# Altium PCB 调试烧写.PcbDoc
Units mm, origin at the board's own origin, x right, y up, seen from the top; angles counter-clockwise.
Board outline 49.02 x 50.29 mm, 2 copper layers (Top Layer, Bottom Layer); 21 components, 21 nets, 109 pads, 8 vias.
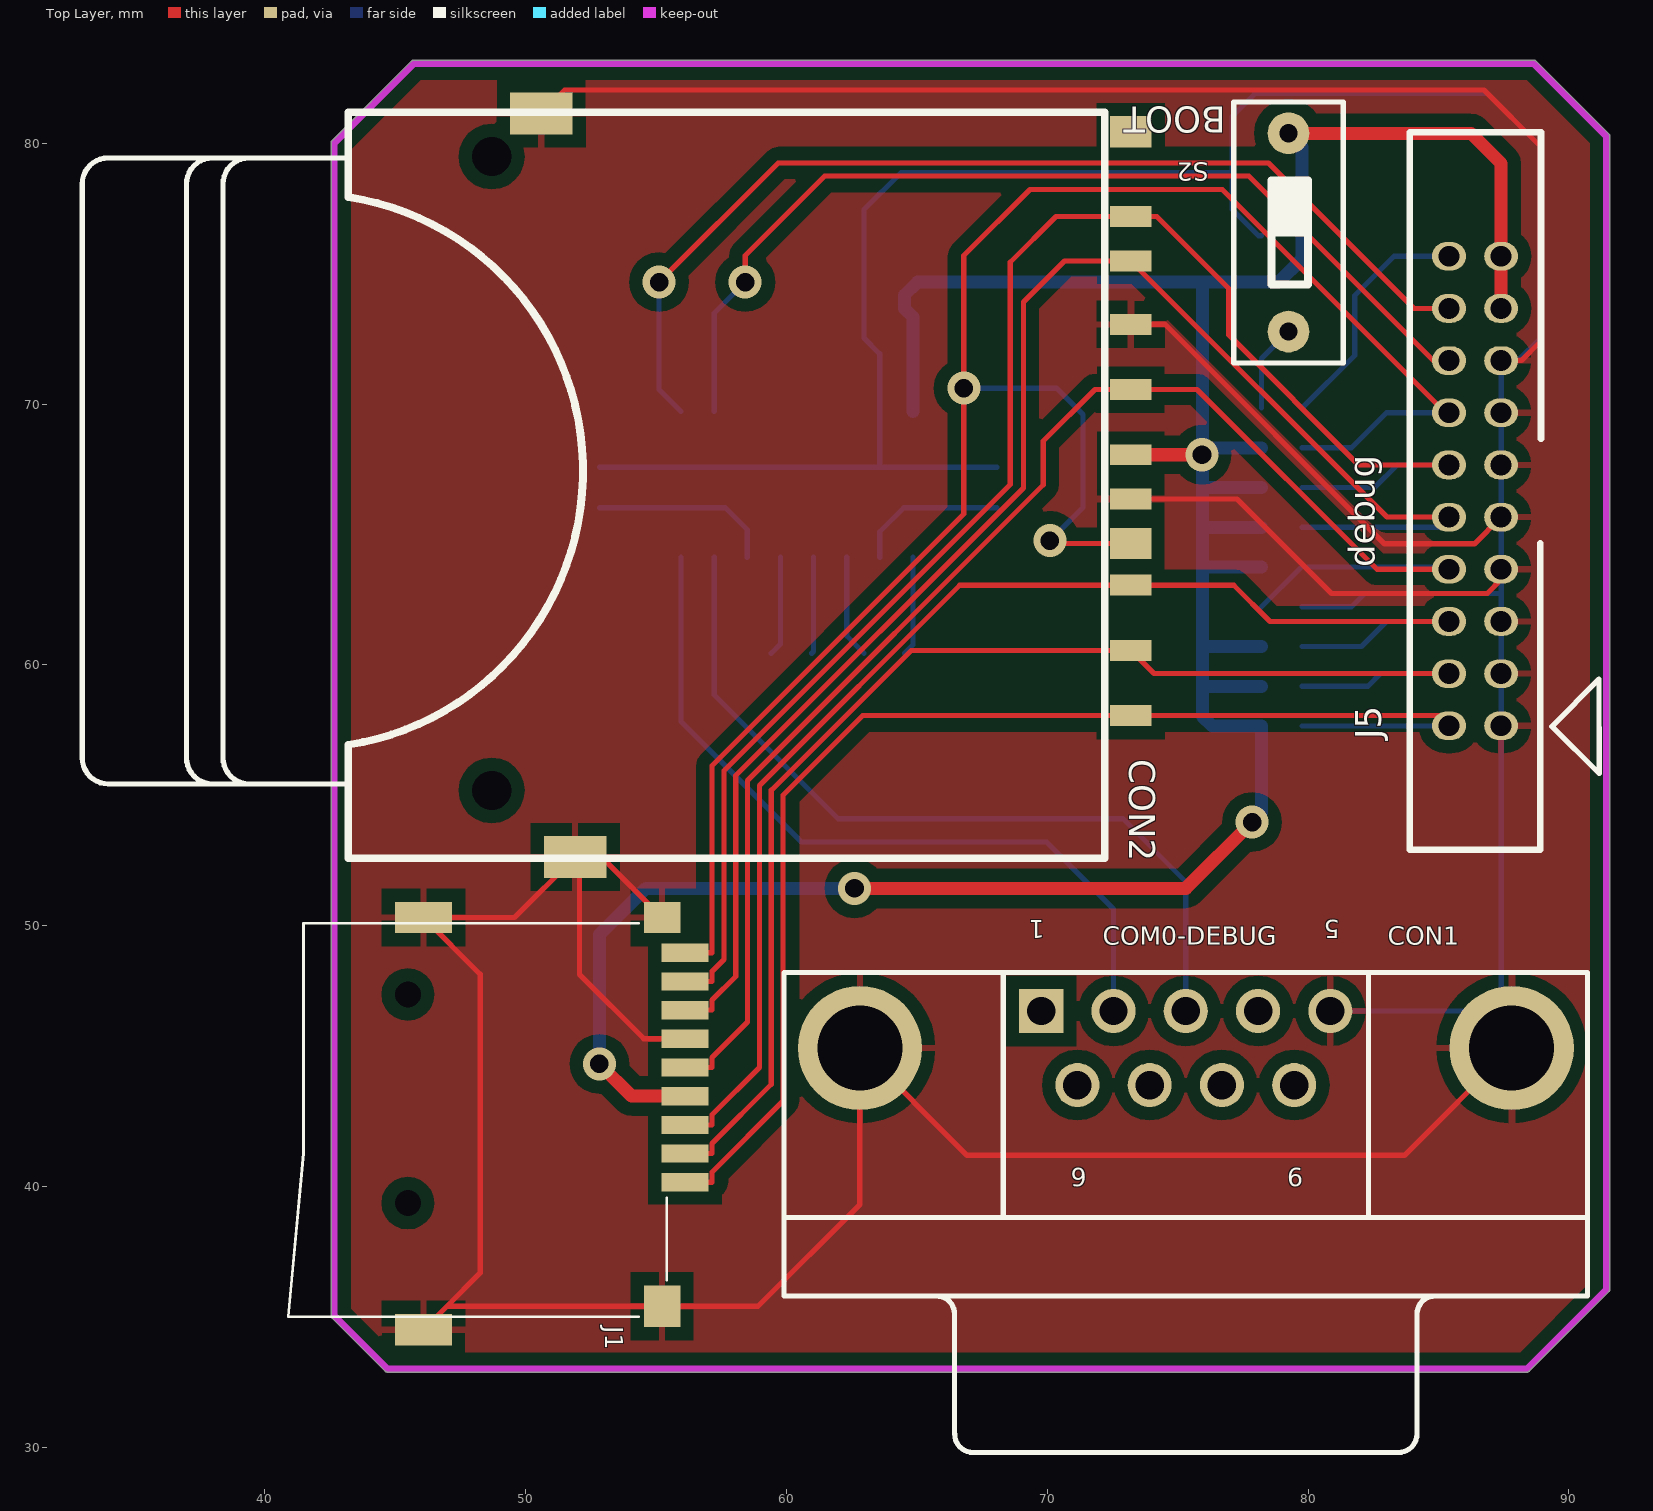
[diagram p0: Top Layer view]
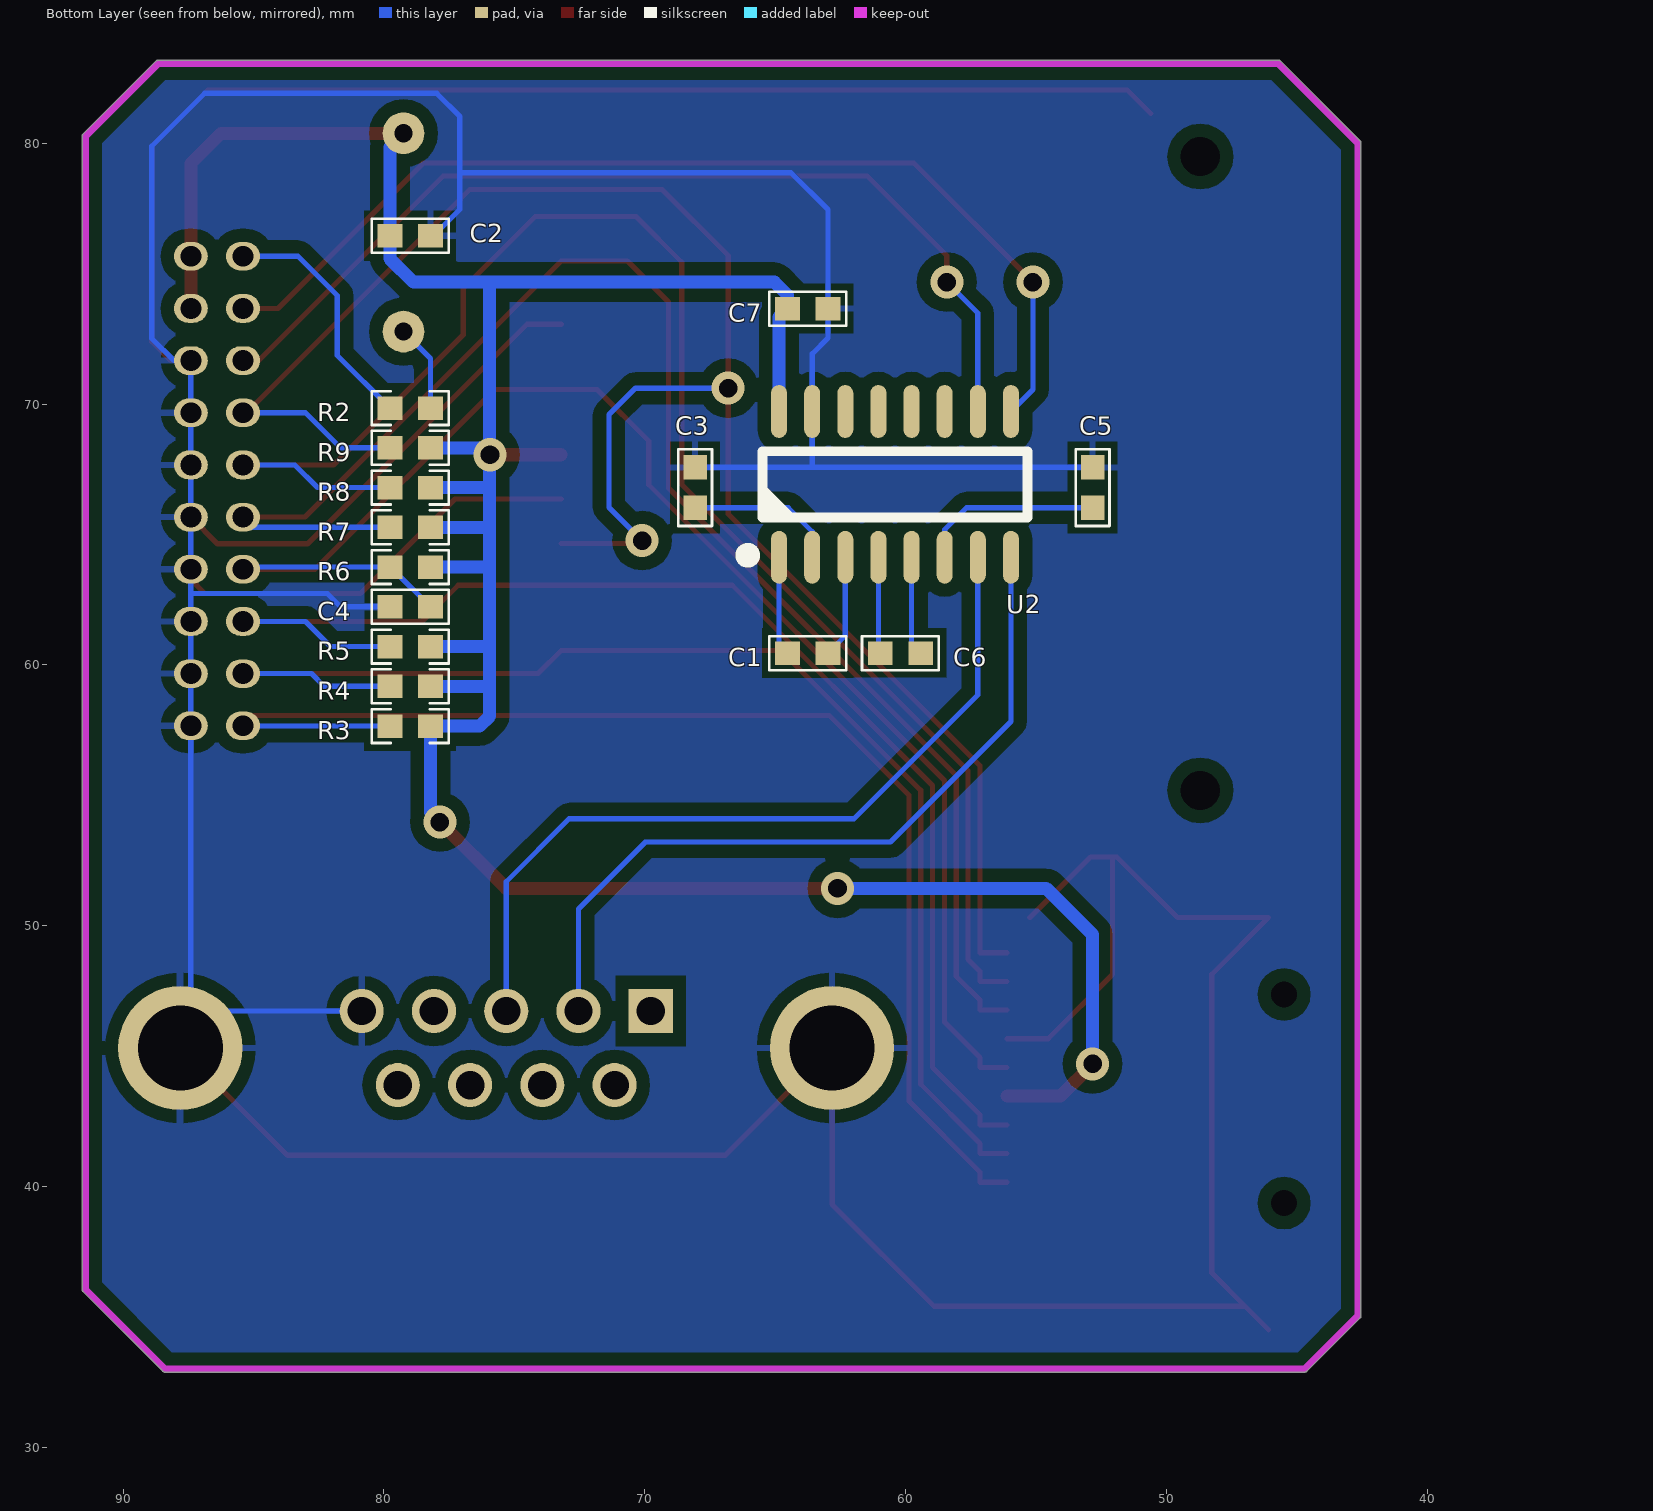
[diagram p1: Bottom Layer view, seen from below]

## Layer stack, top to bottom
Top Layer: signal copper 0.0356
Dielectric: dielectric 0.32, FR-4, Dk 4.8
Bottom Layer: signal copper 0.0356

## Board outline
42.582,34.962 44.614,32.93 44.613,32.93 ccw(c44.704,33.02) 44.704,32.893 88.392,32.893 ccw(c88.392,33.02) 88.483,32.93 88.482,32.93 91.53,35.978 91.53,35.977 ccw(c91.44,36.068) 91.567,36.068 91.567,80.264 ccw(c91.44,80.264) 91.53,80.355 91.53,80.354 88.736,83.148 88.737,83.148 ccw(c88.646,83.058) 88.646,83.185 45.72,83.185 ccw(c45.72,83.058) 45.629,83.148 45.63,83.148 42.582,80.1 42.582,80.101 ccw(c42.672,80.01) 42.545,80.01 42.545,35.052 ccw(c42.672,35.052)

## Design rules (kind name [scope] priority, off if disabled: settings)
Clearance [All] p1: gap=0.5
PolygonConnect [All] p1: connectstyle=Relief reliefconductorwidth=0.254 reliefentries=4 polygonreliefangle="90 Angle"
RoutingVias [All] p1: holewidth=0.711 width=1.27 viastyle="Through Hole" minholewidth=0.711 minwidth=1.27 maxholewidth=0.711 maxwidth=1.27
SilkscreenOverComponentPads [All] p1: minsilkscreentomaskgap=0.254
SolderMaskExpansion [All] p1: expansion=0.102
Width [All] p1: maxlimit=0.5 minlimit=0.2 preferedwidth=0.2
27 further rules are at their usual default settings.

## Components (designator, comment, footprint, x,y, rotation, side; value= is the part's Value field where it differs from the comment)
C1 "Cap" C0603_M1608 63.754,60.452 r180 bottom
C2 "Cap" C0603_M1608 78.994,76.454 r0 bottom (schematic designator C3)
C3 "Cap" C0603_M1608 68.072,66.802 r270 bottom
C4 "Cap" C0603_M1608 78.994,62.23 r180 bottom
C5 "Cap" C0603_M1608 52.832,66.802 r270 bottom
C6 "Cap" C0603_M1608 60.198,60.452 r0 bottom
C7 "C0603" C0603_M1608 63.754,73.66 r0 bottom
CON1 "COM0-DEBUG" DSUB1.385-2H9-M 75.311,35.814 r180 top locked
CON2 "SD" SD-CARD3 60.953,66.889 r270 top locked
J1 "SDCARD-KMSD18" TF-CARD 50.8,42.418 r270 top
J5 "debug" IDC20S 87.376,57.658 r90 top
R2 "R0603" R0603_M1608 78.994,69.85 r0 bottom (schematic designator R3)
R3 "R0603" R0603_M1608 78.994,57.658 r180 bottom
R4 "R0603" R0603_M1608 78.994,59.182 r180 bottom
R5 "R0603" R0603_M1608 78.994,60.706 r180 bottom
R6 "R0603" R0603_M1608 78.994,63.754 r180 bottom
R7 "R0603" R0603_M1608 78.994,65.278 r180 bottom
R8 "R0603" R0603_M1608 78.994,66.802 r180 bottom
R9 "R0603" R0603_M1608 78.994,68.326 r180 bottom
S2 "BOOT" SWITCH_1P 79.248,76.581 r180 top locked (schematic designator S1)
U2 "MAX3232ESE" SOIC-16N 60.452,66.929 r90 bottom

## Footprints (in the part's own frame and the unit in brackets; to place one, negate y for a bottom-side part, rotate by r counter-clockwise, add the part's x,y. Pads: shape width x height; smd on the part's side, far side on the other; paste and mask are expansions set on the pad)
C0603_M1608 [mm] "Chip Capacitor, 2-Leads, Body 1.6x0.8mm, IPC Medium Density"
  rect 0.95x0.9 smd: 1(-0.775,0) 2(0.775,0)
  silkscreen extent -1.48,-0.65 1.48,0.65, body extent -0.85,-0.45 0.85,0.45, height 0.55
DSUB1.385-2H9-M [mm] "Connector; D Subminiature; 9 Position; Right Angle; Pitch 1.385 mm"
  rect 1.69x1.69 hole 1.09: 1(5.54,-10.92)
  round 1.69 hole 1.09: 2(2.77,-10.92) 3(0,-10.92) 4(-2.77,-10.92) 5(-5.54,-10.92) 6(4.155,-8.08) 7(1.385,-8.08) 8(-1.385,-8.08) 9(-4.155,-8.08)
  round 4.76 hole 3.26: 10(-12.495,-9.5) 11(12.495,-9.5)
  silkscreen extent -15.4,-12.4 15.4,6
IDC20S [mm]
  oval 1.1x1.3 hole 0.8: 1(0.01,-0.025) 2(0.01,1.975) 3(2.01,-0.025) 4(2.01,1.975) 5(4.01,-0.025) 6(4.01,1.975) 7(6.01,-0.025) 8(6.01,1.975) 9(8.01,-0.025) 10(8.01,1.975) 11(10.01,-0.025) 12(10.01,1.975) 13(12.01,-0.025) 14(12.01,1.975) 15(14.01,-0.025) 16(14.01,1.975) 17(16.01,-0.025) 18(16.01,1.975) 19(18.01,-0.025) 20(18.01,1.975)
  silkscreen extent -4.74,-3.78 22.76,3.47
R0603_M1608 [mm] "Chip Capacitor, 2-Leads, Body 1.6x0.8mm, IPC Medium Density"
  rect 0.95x0.9 smd: 1(-0.775,0) 2(0.775,0)
  silkscreen extent -1.48,-0.65 1.48,0.65, body extent -0.85,-0.45 0.85,0.45, height 0.55
SD-CARD3 [mm]
  rect 0.8x1.6 smd: 1(6.33,12.25) 2(3.83,12.25) 3(0.53,12.25) 4(-1.17,12.25) 5(-3.67,12.25) 6(-6.17,12.25) 7(-8.6,12.25) 8(-10.3,12.25) 9(8.83,12.25)
  rect 1.2x1.6 smd: 10(-13.55,12.25) 11(2.23,12.25)
  rect 1.6x2.4 smd: 12(-14.25,-10.35) 13(14.25,-9.05)
  round 1 hole 1.5: 14(-12.6,-12.25) 15(11.7,-12.25)
  silkscreen extent -14.3,-27.95 14.3,11.25
SOIC-16N [mil]
  oval 80x24 smd: 1(-110.24,173.23) 2(-110.24,123.23) 3(-110.24,73.23) 4(-110.24,23.23) 5(-110.24,-26.77) 6(-110.24,-76.77) 7(-110.24,-126.77) 8(-110.24,-176.77) 9(109.76,-176.77) 10(109.76,-126.77) 11(109.76,-76.77) 12(109.76,-26.77) 13(109.76,23.23) 14(109.76,73.23) 15(109.76,123.23) 16(109.76,173.23)
  silkscreen extent -116,-202 50,229
SWITCH_1P [mm]
  round 1.6 hole 0.7: 1(0,-3.8) 2(0,3.8)
  silkscreen extent -2.1,-5 2.1,5
TF-CARD [mm]
  round 0 hole 1 unplated: 0(-4.95,-5.312) 0(3.05,-5.312)
  rect 0.7x1.8 smd: 1(1.15,5.313) 2(0.05,5.313) 4(-1.05,5.313) 5(-2.15,5.313) 6(-3.25,5.313) 7(-4.35,5.313) 8(-5.45,5.313) 9(2.25,5.313) 11(-6.55,5.313)
  rect 1.6x1.4 smd: 3(7,4.438)
  rect 1.2x1.4 smd: 6(-7.9,4.438)
  rect 1.2x2.2 smd: 12(7.9,-4.712) 13(-7.9,-4.712)
  silkscreen extent -7.68,-9.9 7.41,4.61

## Part data
C1 C2 C3 C4 C5 C6: "Capacitor"
C7: library part Cap, "Capacitor"
CON1: library part "D Connector 9", "Receptacle Assembly, 9 Position, Right Angle"
J1: library part SDCARD_KMSD18
J5: library part "Header 10X2", "Header, 10-Pin, Dual r"
R2 R3 R4 R5 R6 R7 R8 R9: library part Res1, "Resistor"
S2: library part "SW DIP-1"
U2: library part MAX3232

## Via types
v1: diameter 1.27, hole 0.711, Top Layer to Bottom Layer, 8 vias

## Nets (pads, with @x,y where several pads share a name; then routed paths per layer and width w, separated by ;. In a path a pad name is that pad's centre, name@x,y a point inside that pad or via, vN(x,y) a via of type N, cw(c..) or ccw(c..) an arc to the next point about the centre after c; other vN are vias at no path point)
GND: C2.1 C3.1 C4.1 C5.1 C7.1 CON1.5 CON1.10 CON1.11 CON2.3 CON2.6 CON2.12 CON2.13 J1.3 J1.6 J1.12 J1.13 J5.1 J5.3 J5.5 J5.7 J5.9 J5.11 J5.13 J5.15 U2.15 | length 282.1
  Top Layer w0.2: J1.12 46.988,35.418 ; CON2.12 51.506,82.042 86.741,82.042 88.9,79.883 88.9,72.39 88.178,71.668 J5.15 ; J1.6@55.238,50.318 52.917,52.639 CON2.13@52.07,52.639 ; J1.6@56.113,45.668 54.535,45.668 52.07,48.133 CON2.13@52.07,52.639 ; CON2.3 77.278,66.359 80.899,62.738 86.868,62.738 87.401,63.271 J5.7 ; CON2.6 74.515,73.059 82.931,64.643 86.376,64.643 J5.9 ; CON1.10 83.693,41.201 66.929,41.201 CON1.11 62.816,39.321 58.913,35.418 J1.3 46.988,35.418 ; 46.988,35.418 48.26,36.69 48.26,48.146 J1.13 49.582,50.318 CON2.13 CON2.13@52.07,52.639
  Bottom Layer w0.2: C5.1 63.5,67.577 ; C3.1 63.5,67.577 ; C2.1 78.105,76.454 77.089,77.47 77.089,78.867 ; C4.1 81.661,62.23 82.169,62.738 87.401,62.738 ; CON1.5 86.386,46.734 CON1.10@87.401,45.719 ; CON1.10 CON1.10@87.401,45.719 ; 63.5,67.577 63.582,67.659 U2.15 63.582,71.927 62.979,72.53 C7.1 62.979,77.457 64.389,78.867 77.089,78.867 ; 77.089,78.867 77.089,81.026 77.978,81.915 86.868,81.915 88.9,79.883 88.9,72.517 88.051,71.668 J5.15 J5.13 J5.11 J5.9 J5.7 87.401,62.738 ; CON1.10@87.401,45.719 J5.3 J5.5 87.401,62.738
LCD-D2: J5.20 R2.2 | length 9.4
  Bottom Layer w0.2: R2.2 81.788,71.869 81.788,74.168 83.288,75.668 J5.20
MMC0-CD: CON2.11 J1.11 J5.14 R9.1 | length 74.6
  Top Layer w0.2: J1.11 57.15,48.968 57.15,56.134 66.802,65.786 v1(66.802,70.612) 66.802,75.692 69.342,78.232 76.708,78.232 85.272,69.668 J5.14 ; v1(70.104,64.77) 70.215,64.659 CON2.11
  Bottom Layer w0.2: v1(66.802,70.612) 70.358,70.612 71.374,69.596 71.374,66.04 v1(70.104,64.77) ; R9.1 81.661,68.326 83.003,69.668 J5.14
MMC0-CLK: C4.2 CON2.5 J1.5 J5.8 R6.1 | length 57.4
  Top Layer w0.2: J1.5 57.15,44.568 57.15,44.955 58.512,46.317 58.512,55.57 69.85,66.908 69.85,68.58 71.829,70.559 CON2.5 75.745,70.559 82.636,63.668 J5.8
  Bottom Layer w0.2: C4.2 79.743,63.754 R6.1 85.315,63.754 J5.8
MMC0-CMD: CON2.2 J1.2 J5.6 R5.1 | length 51
  Top Layer w0.2: J1.2 57.15,42.368 57.15,42.755 58.966,44.571 58.966,55.382 66.643,63.059 CON2.2 77.149,63.059 78.54,61.668 J5.6
  Bottom Layer w0.2: R5.1 82.042,60.706 83.004,61.668 J5.6
MMC0-DAT0: CON2.7 J1.7 J5.10 R7.1 | length 60
  Top Layer w0.2: J1.7 57.15,46.768 57.15,47.155 58.058,48.063 58.058,55.758 69.088,66.788 69.088,73.914 70.663,75.489 CON2.7 83.024,65.668 J5.10
  Bottom Layer w0.2: R7.1 85.011,65.278 J5.10
MMC0-DAT1: CON2.8 J1.8 J5.12 R8.1 | length 61.9
  Top Layer w0.2: J1.8 57.15,47.868 57.15,48.255 57.604,48.709 57.604,55.946 68.58,66.922 68.58,75.438 70.331,77.189 CON2.8 74.195,77.189 76.962,74.422 76.962,72.644 81.938,67.668 J5.12
  Bottom Layer w0.2: R8.1 82.55,66.802 83.416,67.668 J5.12
MMC0-DAT2: CON2.9 J1.9 J5.2 R3.1 | length 49.6
  Top Layer w0.2: J1.9 57.15,40.168 57.15,40.555 59.874,43.279 59.874,55.006 62.927,58.059 CON2.9 85.01,58.059 J5.2
  Bottom Layer w0.2: R3.1 85.391,57.658 J5.2
MMC0-DAT3: CON2.1 J1.1 J5.4 R4.1 | length 50.3
  Top Layer w0.2: J1.1 57.15,41.268 57.15,41.655 59.42,43.925 59.42,55.194 64.785,60.559 CON2.1 74.094,59.668 J5.4
  Bottom Layer w0.2: R4.1 82.296,59.182 82.782,59.668 J5.4
NetC1_1: C1.1 U2.1 | length 3.8
  Bottom Layer w0.2: C1.1 64.852,60.775 U2.1
NetC1_2: C1.2 U2.3 | length 4
  Bottom Layer w0.2: U2.3 62.312,61.119 C1.2
NetC3_2: C3.2 U2.2 | length 5.8
  Bottom Layer w0.2: U2.2 63.582,65.106 64.503,66.027 C3.2
NetC5_2: C5.2 U2.6 | length 7.1
  Bottom Layer w0.2: C5.2 57.671,66.027 58.502,65.196 U2.6
NetC6_1: C6.1 U2.5 | length 3.8
  Bottom Layer w0.2: C6.1 59.772,60.801 U2.5
NetC6_2: C6.2 U2.4 | length 3.7
  Bottom Layer w0.2: C6.2 61.042,60.521 U2.4
NetCON1_2: CON1.2 U2.8 | length 29.8
  Bottom Layer w0.2: U2.8 55.962,57.83 60.579,53.213 69.977,53.213 72.541,50.649 CON1.2
NetCON1_3: CON1.3 U2.7 | length 31.3
  Bottom Layer w0.2: U2.7 57.232,58.846 61.976,54.102 72.898,54.102 75.311,51.689 CON1.3
NetR2_1: R2.1 S2.2 | length 3.4
  Bottom Layer w0.2: R2.1 78.219,71.752 S2.2
UART0-RXD: J5.18 U2.9 | length 39.8
  Top Layer w0.2: v1(55.118,74.676) 59.69,79.248 78.486,79.248 84.066,73.668 J5.18
  Bottom Layer w0.2: v1(55.118,74.676) 55.118,70.561 U2.9
UART0-TXD: J5.16 U2.10 | length 37.6
  Top Layer w0.2: v1(58.42,74.676) 58.42,75.692 61.468,78.74 77.724,78.74 84.796,71.668 J5.16
  Bottom Layer w0.2: U2.10 57.232,73.488 v1(58.42,74.676)
VDD3V3: C2.2 C7.2 CON2.4 J1.4 J5.17 J5.19 R3.2 R4.2 R5.2 R6.2 R7.2 R8.2 R9.2 S2.1 U2.16 | length 114.2
  Top Layer w0.5: v1(52.832,44.704) 54.068,43.468 J1.4 ; v1(62.611,51.435) 75.311,51.435 v1(77.851,53.975) ; CON2.4 v1(75.933,68.059) ; S2.1 86.243,80.381 87.401,79.223 J5.19 J5.17
  Bottom Layer w0.5: v1(52.832,44.704) 52.832,49.657 54.61,51.435 v1(62.611,51.435) ; U2.16 64.852,73.337 C7.2 64.529,74.181 65.024,74.676 75.946,74.676 ; 76.073,59.182 R4.2 ; 76.073,65.278 R7.2 ; v1(77.851,53.975) 78.219,54.343 R3.2 76.327,57.658 75.946,58.039 75.946,60.706 ; R5.2 75.946,60.706 ; R6.2 75.946,63.754 ; R8.2 75.946,66.802 ; R9.2 v1@75.946,68.326 ; S2.1 79.769,79.86 C2.2 79.769,75.578 78.867,74.676 75.946,74.676 ; 75.946,60.706 75.946,63.754 ; 75.946,63.754 75.946,66.802 ; 75.946,66.802 v1@75.946,68.326 ; v1@75.946,68.326 75.946,74.676
pads on no net: CON1.1 CON1.4 CON1.6 CON1.7 CON1.8 CON1.9 CON2.10 CON2.14 CON2.15 J1.0 U2.11 U2.12 U2.13 U2.14

## Polygon pours and split planes (outlines as drawn)
GND on Top Layer "Bottom Layer-No Net" (solid, remove dead copper, pour order 2): 41.148,84.582 89.408,84.582 90.678,83.312 92.456,81.534 92.456,71.628 92.456,34.544 90.17,32.258 89.662,31.75 44.196,31.75 42.164,31.75 38.862,35.052
GND on Bottom Layer "Bottom Layer-No Net" (solid, remove dead copper, pour order 4): 42.418,84.074 43.434,85.09 89.154,85.09 90.932,85.09 93.472,82.55 95.758,80.264 95.758,57.658 95.758,36.576 90.424,31.242 47.244,31.242 44.196,31.242 40.386,35.052 39.878,35.56 39.878,83.058

## Keep-outs
Keep-Out Layer:
  lines w0.254: 42.672,47.244 42.672,80.01 45.72,83.058 88.646,83.058 91.44,80.264 91.44,36.068 88.392,33.02 44.704,33.02 42.672,35.052 42.672,47.752

## Text inside footprints (layer, text, board x,y; h text height)
CON1: Top Overlay "6" at 71.511,40.714 h0.7 r180; Top Overlay "9" at 79.811,40.714 h0.7 r180; Top Overlay "5" at 81.211,50.214 h0.7 r180; Top Overlay "1" at 69.911,50.214 h0.7 r180